# EAGLE board roller-shutter-rs485-double (EAGLE 9.6.2)
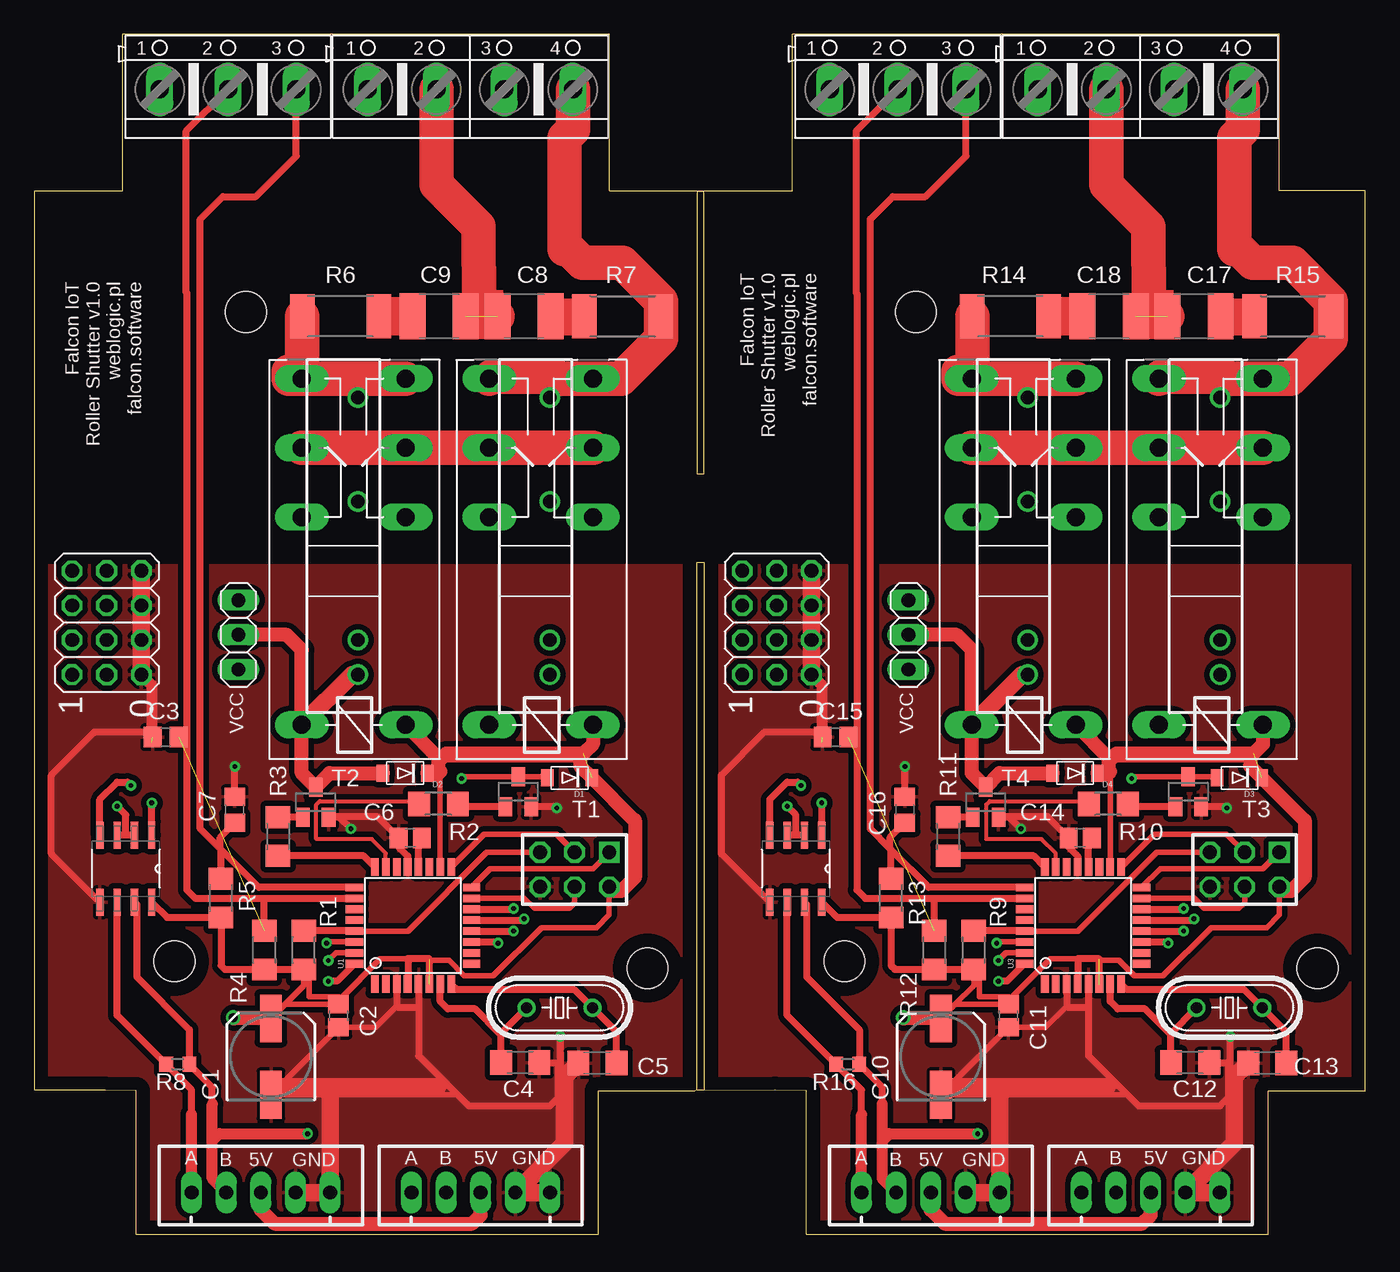
[diagram p0: board, top side]
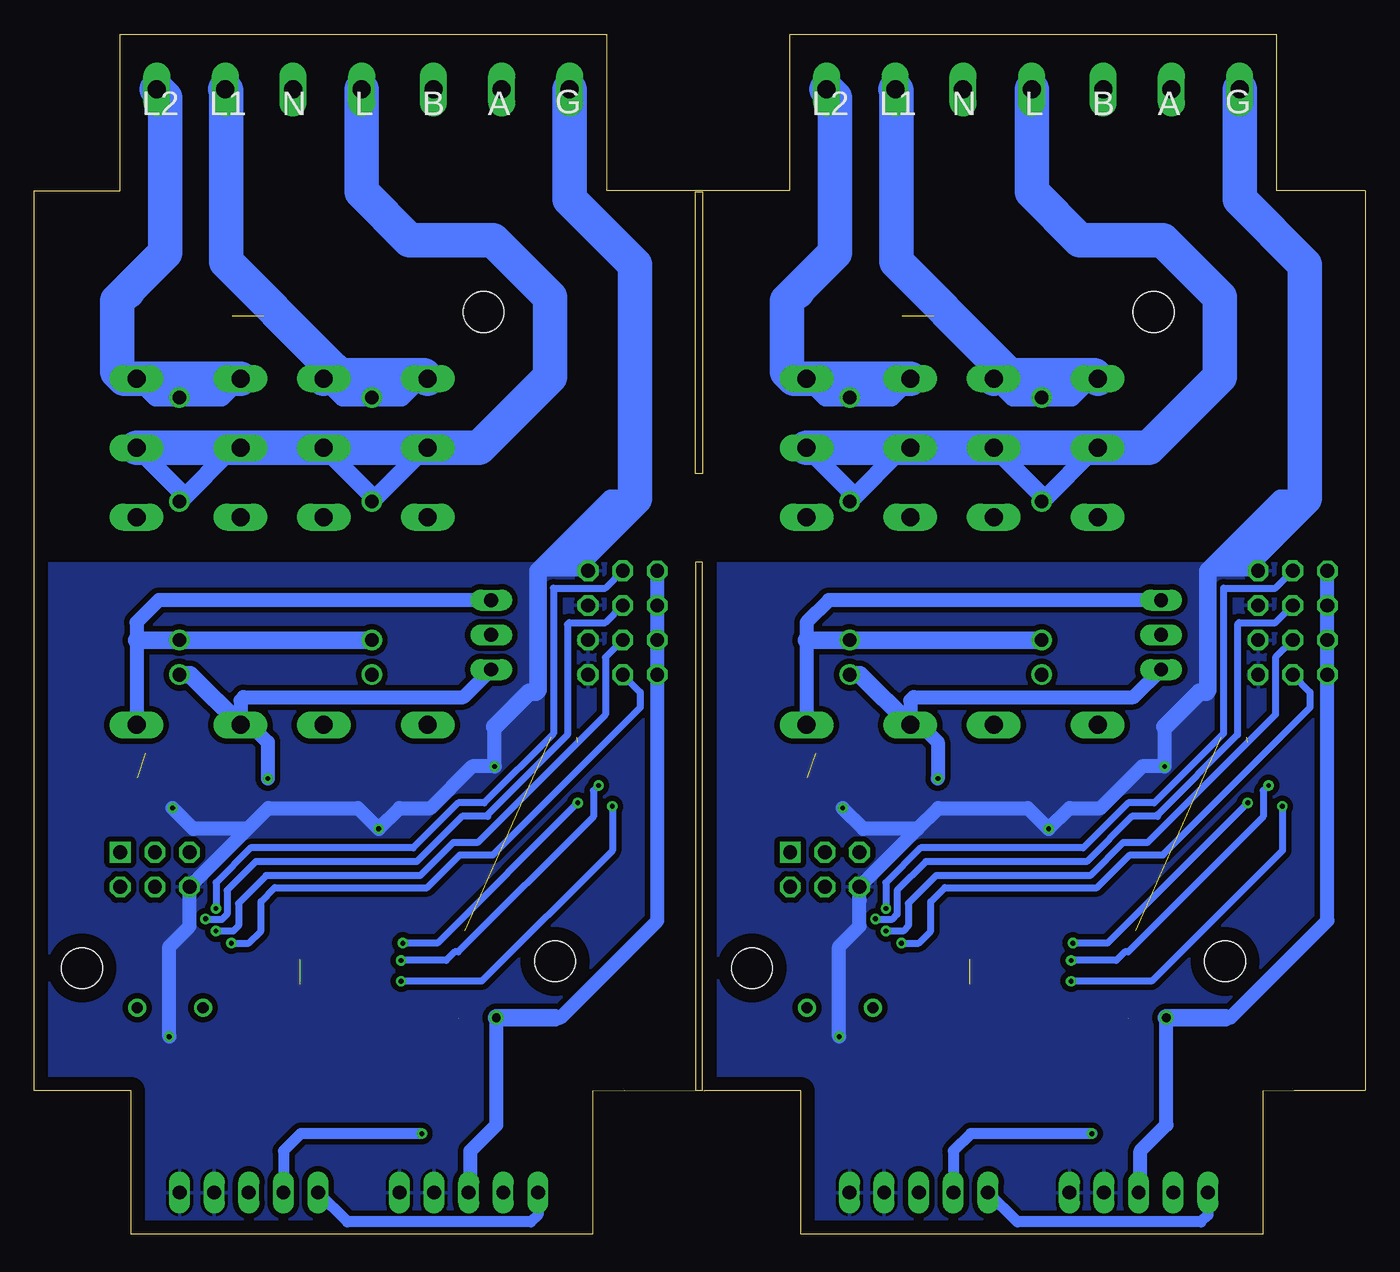
[diagram p1: board, bottom side, seen from below]

Size 97.65 x 88 mm. Coordinates in mm from the lower left corner, seen from the top.
Outline: 7.5,0 41.4,0 41.4,10.5 48.5,10.5 54.36,10.54 56.65,10.5 56.65,0 90.55,0 90.55,10.5 97.65,10.5 97.65,76.5 91.35,76.5 91.35,88 55.65,88 55.65,76.5 42.2,76.5 42.2,88 6.5,88 6.5,76.5 0,76.5 0,10.54 5.21,10.54 7.5,10.5 7.5,0
Outline: 48.64,55.75 49.15,55.75 49.15,76.45 48.64,76.45 48.64,55.75
Outline: 48.64,49.28 49.15,49.28 49.15,10.54 48.64,10.54 48.64,49.28
Copper layers (1*16): Top 0.035mm / dielectric 1.5mm / Bottom 0.035mm
Design rules "default": minimum track width 6mil, minimum drill 0.35mm, track to track 6mil, track to pad 6mil, pad to pad 6mil, via to via 6mil, smd to smd 6mil, copper to edge 40mil, drill to drill 6mil, minimum pad ring 10mil, minimum via ring 8mil, stop-mask expansion 4mil, vias tented up to drill 0mil, thermal gap 10mil
Holes 3 mm at 10.3,20 15.55,67.62 45,19.5 59.45,20 64.7,67.62 94.15,19.5

## Footprints (pad centres in the part's own frame; a part is rotated, then mirrored left to right if it is on the bottom)
SANYO-OSCON_SMD_C6 = smd 3.5 x 1.6: + 2.8,0; - -2.8,0
C0805 = smd 1.3 x 1.5: 1 -0.85,0; 2 0.85,0
C0805' = smd 1.3 x 1.5: 1 -0.95,0; 2 0.95,0
C1206 = smd 1.6 x 1.8: 1 -1.4,0; 2 1.4,0
C1812 = smd 1.9 x 3.4: 1 -1.95,0; 2 1.95,0
SOD-123FL = smd 0.91 x 1.22: A 1.637,0; C -1.637,0
AVR-ISP-6 = drill 1.016 square: 1 -2.54,-1.27 | drill 1.016 octagon: 2 -2.54,1.27; 3 0,-1.27; 4 0,1.27; 5 2.54,-1.27; 6 2.54,1.27
1X03 = drill 1.016 long: 1 -2.54,0; 2 0,0; 3 2.54,0
3X04 = drill 1 octagon: 1 -3.81,-3.81; 4 -1.27,-3.81; 7 1.27,-3.81; 10 3.81,-3.81 | drill 1.016 octagon: 2 -3.81,-1.27; 3 -3.81,1.27; 5 -1.27,-1.27; 6 -1.27,1.27; 8 1.27,-1.27; 9 1.27,1.27; 11 3.81,-1.27; 12 3.81,1.27
RP420 = drill 1.321 long: 11 16.51,-3.81; 12 11.43,-3.81; 14 21.59,-3.81; 21 16.51,3.81; 22 11.43,3.81; 24 21.59,3.81; A1 -3.81,-3.81; A2 -3.81,3.81
OMRON-G3MB-202P-SSR = drill 1: 1 -12.7,0; 2 -5.08,0; 3 5.08,0; 4 7.62,0
HC49/S = drill 0.813: 1 -2.413,0; 2 2.413,0
R1206 = smd 1.6 x 1.803: 1 -1.422,0; 2 1.422,0
R2512 = smd 1.8 x 3.2: 1 -2.8,0; 2 2.8,0
R0603 = smd 1 x 1.1: 1 -0.85,0; 2 0.85,0
SOT23 = smd 1 x 1.4: 1 -0.95,-1.1; 2 0.95,-1.1; 3 0,1.1
TQFP32-08 = smd 1.27 x 0.559: 1 -4.293,2.8; 2 -4.293,2; 3 -4.293,1.2; 4 -4.293,0.4; 5 -4.293,-0.4; 6 -4.293,-1.2; 7 -4.293,-2; 8 -4.293,-2.8; 17 4.293,-2.8; 18 4.293,-2; 19 4.293,-1.2; 20 4.293,-0.4; 21 4.293,0.4; 22 4.293,1.2; 23 4.293,2; 24 4.293,2.8 | smd 0.559 x 1.27: 9 -2.8,-4.293; 10 -2,-4.293; 11 -1.2,-4.293; 12 -0.4,-4.293; 13 0.4,-4.293; 14 1.2,-4.293; 15 2,-4.293; 16 2.8,-4.293; 25 2.8,4.293; 26 2,4.293; 27 1.2,4.293; 28 0.4,4.293; 29 -0.4,4.293; 30 -1.2,4.293; 31 -2,4.293; 32 -2.8,4.293
SOIC127P600X175-8N = smd 1.981 x 0.533: 1 -2.464,1.905; 2 -2.464,0.635; 3 -2.464,-0.635; 4 -2.464,-1.905; 5 2.464,-1.905; 6 2.464,-0.635; 7 2.464,0.635; 8 2.464,1.905
JST-XH-05-PACKAGE-LONG-PAD = drill 1.016 long: 1 -5.08,0; 2 -2.54,0; 3 0,0; 4 2.54,0; 5 5.08,0
AK500/3 = drill 1.321 long: 1 -5.004,0; 2 0,0; 3 5.004,0
AK500/4 = drill 1.321 long: 1 -7.518,0; 2 -2.489,0; 3 2.489,0; 4 7.518,0

## Placement (x,y rotation side)
C1  [SANYO-OSCON_SMD_C6]  17.38,13.02 90 top
C2  0.1uF  [C0805]  22.34,16.01 270 top
C3  [C0805']  9.65,36.45 0 top
C4  22pF  [C1206]  35.66,12.56 0 top
C5  22pF  [C1206]  41.33,12.54 180 top
C6  0.1uF  [C0805]  27.6,29.05 180 top
C7  [C0805']  14.73,31.11 270 top
C8  [C1812]  35.94,67.31 0 top
C9  [C1812]  29.72,67.31 180 top
C10  [SANYO-OSCON_SMD_C6]  66.53,13.02 90 top
C11  0.1uF  [C0805]  71.49,16.01 270 top
C12  22pF  [C1206]  84.81,12.56 0 top
C13  22pF  [C1206]  90.47,12.54 180 top
C14  0.1uF  [C0805]  76.75,29.05 180 top
C15  [C0805']  58.8,36.45 0 top
C16  [C0805']  63.88,31.11 270 top
C17  [C1812]  85.09,67.31 0 top
C18  [C1812]  78.87,67.31 180 top
D1  [SOD-123FL]  39.28,33.46 180 top
D2  [SOD-123FL]  27.22,33.79 180 top
D3  [SOD-123FL]  88.43,33.46 180 top
D4  [SOD-123FL]  76.37,33.79 180 top
JP1  AVR-ISP-6  [AVR-ISP-6]  39.66,26.73 180 top
JP2  [1X03]  14.99,43.94 90 top
JP3  AVR-ISP-6  [AVR-ISP-6]  88.81,26.73 180 top
JP4  [1X03]  64.14,43.94 90 top
JP5  [3X04]  55.75,44.83 270 top
JP6  [3X04]  6.6,44.83 270 top
K1  RP421110  [RP420]  37.19,41.15 90 top
K2  OMRON-G3MB-202P-SSR  [OMRON-G3MB-202P-SSR]  37.85,48.64 270 top
K3  OMRON-G3MB-202P-SSR  [OMRON-G3MB-202P-SSR]  23.75,48.64 270 top
K4  RP421110  [RP420]  23.45,41.15 90 top
K5  RP421110  [RP420]  86.34,41.15 90 top
K6  RP421110  [RP420]  72.6,41.15 90 top
K7  OMRON-G3MB-202P-SSR  [OMRON-G3MB-202P-SSR]  87,48.64 270 top
K8  OMRON-G3MB-202P-SSR  [OMRON-G3MB-202P-SSR]  72.9,48.64 270 top
Q1  16MHz  [HC49/S]  38.54,16.6 180 top
Q2  16MHz  [HC49/S]  87.69,16.6 180 top
R1  10K  [R1206]  19.79,20.82 270 top
R2  [R1206]  29.66,31.55 0 top
R3  [R1206]  17.9,29.15 90 top
R4  [R1206]  16.89,20.83 270 top
R5  [R1206]  13.72,24.64 270 top
R6  [R2512]  22.48,67.31 180 top
R7  [R2512]  43.18,67.31 0 top
R8  120R  [R0603]  10.54,12.45 180 top
R9  10K  [R1206]  68.94,20.82 270 top
R10  [R1206]  78.81,31.55 0 top
R11  [R1206]  67.05,29.15 90 top
R12  [R1206]  66.04,20.83 270 top
R13  [R1206]  62.87,24.64 270 top
R14  [R2512]  71.63,67.31 180 top
R15  [R2512]  92.33,67.31 0 top
R16  120R  [R0603]  59.69,12.45 180 top
T1  BC847  [SOT23]  35.52,32.45 0 top
T2  BC847  [SOT23]  20.66,31.68 0 top
T3  BC847  [SOT23]  84.67,32.45 0 top
T4  BC847  [SOT23]  69.81,31.68 0 top
U1  ATMEGA328  [TQFP32-08]  27.8,22.62 90 top
U2  MAX487ESA+TCBX  [SOIC127P600X175-8N]  6.73,26.8 270 top
U3  ATMEGA328  [TQFP32-08]  76.95,22.62 90 top
U4  MAX487ESA+TCBX  [SOIC127P600X175-8N]  55.88,26.8 270 top
X1  JST-XH-05-PIN-LONG-PAD  [JST-XH-05-PACKAGE-LONG-PAD]  65.79,3.05 0 top
X2  JST-XH-05-PIN-LONG-PAD  [JST-XH-05-PACKAGE-LONG-PAD]  16.64,3.05 0 top
X3  JST-XH-05-PIN-LONG-PAD  [JST-XH-05-PACKAGE-LONG-PAD]  32.77,3.05 0 top
X4  [AK500/3]  14.22,83.95 0 top
X5  [AK500/4]  32,83.95 0 top
X6  JST-XH-05-PIN-LONG-PAD  [JST-XH-05-PACKAGE-LONG-PAD]  81.92,3.05 0 top
X7  [AK500/3]  63.37,83.95 0 top
X8  [AK500/4]  81.15,83.95 0 top

## Library data of the parts
C1 C10 = rcl; SPICEPREFIX: C
C2 C4-C6 C11-C14 D1-D4 R1 R9 = adafruit
C3 C7-C9 C15-C18 = eagle-ltspice; SPICEMODEL: NONE; SPICEPREFIX: C
JP1 JP3 = atmel-1
JP2 JP4 = pinhead
JP5 JP6 = pinhead-zmiany-JP
K1 K4-K6 = relay; MF: TYCO ELECTRONICS; MPN: RP421110; OC_FARNELL: unknown; OC_NEWARK: 39C2625
K2 K3 K7 K8 = Omron G3MB 202p SSR
Q1 Q2 = crystal
R2-R8 R10-R16 = eagle-ltspice; SPICEMODEL: NONE; SPICEPREFIX: R
T1-T4 = transistor
U1 U3 = thecustomgeek
U2 U4 = MAX487ESA_TCBX; AVAILABILITY: Warning; DESCRIPTION: 1/1 Transceiver Half RS422, RS485 8-SOIC; MF: Maxim Integrated; MP: MAX487ESA+TCBX; PACKAGE: SOIC-8 Maxim Integrated; PRICE: None; PURCHASE-URL: https://pricing.snapeda.com/search/part/MAX487ESA+TCBX/?ref=eda
X1-X3 X6 = Rembrandt Electronics - JST XH Connectors v1-0
X4 X5 X7 X8 = con-ptr500; OC_FARNELL: unknown; OC_NEWARK: unknown

## Nets
A: R8.2 U2.6 X2.1 X3.1
A0: R2.1 U1.23
A1: R3.1 U1.24
A2: C7.2 R5.1 U1.25 X4.3
A3: C3.2 R4.1 U1.26 X4.2
A4: R10.1 U3.23
A5: R11.1 U3.24
A6: U1.19
A7: U1.22
A8: C16.2 R13.1 U3.25 X7.3
A9: C15.2 R12.1 U3.26 X7.2
A10: U3.19
A11: U3.22
A12: R16.2 U4.6 X1.1 X6.1
AREF: C6.1 U1.20
AREF1: C14.1 U3.20
B: R8.1 U2.7 X2.2 X3.2
B1: R16.1 U4.7 X1.2 X6.2
D0: U1.30 U2.1
D1: U1.31 U2.4
D2: U1.32 U2.2 U2.3
D3: U1.1
D4: U1.2
D5: U1.9
D6: U1.10
D7: JP6.11 U1.11
D8: JP6.8 U1.12
D9: JP6.5 U1.13
D10: JP6.2 U1.14
D11: JP1.4 U1.15
D12: JP1.1 U1.16
D13: JP1.3 U1.17
D14: U3.30 U4.1
D15: U3.31 U4.4
D16: U3.32 U4.2 U4.3
D17: U3.1
D18: U3.2
D19: U3.9
D20: U3.10
D21: JP5.11 U3.11
D22: JP5.8 U3.12
D23: JP5.5 U3.13
D24: JP5.2 U3.14
D25: JP3.4 U3.15
D26: JP3.1 U3.16
D27: JP3.3 U3.17
GND: C1.- C2.2 C3.1 C4.2 C5.2 C6.2 C7.1 JP1.6 JP6.3 JP6.6 JP6.9 JP6.12 T1.2 T2.2 U1.3 U1.5 U1.21 U2.5 X2.4 X2.5 X3.4 X3.5 X4.1
GND1: C10.- C11.2 C12.2 C13.2 C14.2 C15.1 C16.1 JP3.6 JP5.3 JP5.6 JP5.9 JP5.12 T3.2 T4.2 U3.3 U3.5 U3.21 U4.5 X1.4 X1.5 X6.4 X6.5 X7.1
N$1: D1.A JP2.1 K1.A2 K2.4 T1.3
N$2: D2.A JP2.2 K3.4 K4.A2 T2.3
N$3: C12.1 Q2.2 U3.7
N$4: K1.11 K1.21 K2.2 K3.2 K4.11 K4.21 X5.1
N$5: R2.2 T1.1
N$6: R3.2 T2.1
N$7: K1.14 K1.24 K2.1 R7.2 X5.4
N$8: K3.1 K4.14 K4.24 R6.2 X5.3
N$9: C8.2 R7.1
N$10: C9.2 R6.1
N$11: C8.1 C9.1 X5.2
N$12: C13.1 Q2.1 U3.8
N$13: D3.A JP4.1 K5.A2 K7.4 T3.3
N$14: D4.A JP4.2 K6.A2 K8.4 T4.3
N$15: R10.2 T3.1
N$16: R11.2 T4.1
N$17: K5.11 K5.21 K6.11 K6.21 K7.2 K8.2 X8.1
N$18: K5.14 K5.24 K7.1 R15.2 X8.4
N$19: K6.14 K6.24 K8.1 R14.2 X8.3
N$20: C17.2 R15.1
N$21: C18.2 R14.1
N$22: C17.1 C18.1 X8.2
N$43: C4.1 Q1.2 U1.7
N$44: C5.1 Q1.1 U1.8
RST: JP1.5 R1.1 U1.29
RST1: JP3.5 R9.1 U3.29
SCL: U1.28
SCL1: U3.28
SDA: U1.27
SDA1: U3.27
VCC: C1.+ C2.1 D1.C D2.C JP1.2 JP2.3 JP6.1 JP6.4 JP6.7 JP6.10 K1.A1 K2.3 K3.3 K4.A1 R1.2 R4.2 R5.2 U1.4 U1.6 U1.18 U2.8 X2.3 X3.3
VCC1: C10.+ C11.1 D3.C D4.C JP3.2 JP4.3 JP5.1 JP5.4 JP5.7 JP5.10 K5.A1 K6.A1 K7.3 K8.3 R9.2 R12.2 R13.2 U3.4 U3.6 U3.18 U4.8 X1.3 X6.3

## Tracks (layer width: path | path; a pad name or v marks a point on that pad's centre or on a via)
A
  Top 0.508: 11.56,8.76 11.56,10.58 R8.2 6.1,16.04 U2.6
  Top 0.813: X2.1 11.56,8.76
  Bottom 0.813: X2.1 11.56,1.4 12.06,0.89 25.53,0.89 X3.1
A0
  Top 0.305: U1.23 25.8,27.92 24.77,28.96 20.7,28.96 20.7,31.5 20.95,31.75 28.04,31.75 R2.1
A1
  Top 0.508: U1.24 24.18,27.73 R3.1
A2
  Top 0.508: U1.25 16.49,25.42 13.72,28.19 | 13.72,28.19 13.65,28.26 | 13.65,28.26 12.19,29.72 12.19,74.42 13.84,76.07 16.26,76.07 19.23,79.05 X4.3 | R5.1 13.72,28.19 | 13.65,28.26 13.65,29.09 C7.2
A3  (1 unrouted)
  Top 0.508: 17.02,24.62 11.83,24.62 11.2,25.25 11.2,69 11.18,69.02 11.18,80.9 X4.2 | 17.02,24.62 U1.26 | R4.1 16.89,24.49 17.02,24.62
A4
  Top 0.305: U3.23 74.95,27.92 73.91,28.96 69.85,28.96 69.85,31.5 70.1,31.75 77.19,31.75 R10.1
A5
  Top 0.508: U3.24 73.33,27.73 R11.1
A8
  Top 0.508: U3.25 65.64,25.42 62.87,28.19 | 62.87,28.19 62.8,28.26 | 62.8,28.26 61.34,29.72 61.34,74.42 62.99,76.07 65.41,76.07 68.38,79.05 X7.3 | R13.1 62.87,28.19 | 62.8,28.26 62.8,29.09 C16.2
A9  (1 unrouted)
  Top 0.508: 66.17,24.62 60.98,24.62 60.35,25.25 60.35,69 60.33,69.02 60.33,80.9 X7.2 | 66.17,24.62 U3.26 | R12.1 66.04,24.49 66.17,24.62
A12
  Top 0.508: 60.71,8.76 60.71,10.58 R16.2 55.24,16.04 U4.6
  Top 0.813: X1.1 60.71,8.76
  Bottom 0.813: X1.1 60.71,1.4 61.21,0.89 74.68,0.89 X6.1
AREF
  Top 0.508: U1.20 28.2,28.8 C6.1
AREF1
  Top 0.508: U3.20 77.35,28.8 C14.1
B  (via drill 0.35)
  Top 0.508: 13.08,9.53 13.08,10.76 R8.1 11.39,14.99 7.53,18.85 7.53,24.17 U2.7
  Top 0.813: X2.2 13.08,4.06 13.08,6.86 | 13.08,6.86 13.08,9.53 | 13.08,6.86 13.59,7.37 v20.07,7.37
  Bottom 0.813: v20.07,7.37 28.96,7.37 30.23,6.1 X3.2
B1  (via drill 0.35)
  Top 0.508: 62.23,9.53 62.23,10.76 R16.1 60.54,14.99 56.68,18.85 56.68,24.17 U4.7
  Top 0.813: X1.2 62.23,4.06 62.23,6.86 | 62.23,6.86 62.23,9.53 | 62.23,6.86 62.74,7.37 v69.22,7.37
  Bottom 0.813: v69.22,7.37 78.11,7.37 79.38,6.1 X6.2
D0  (via drill 0.35)
  Top 0.406: U1.30 21.55,21.42 v21.46,21.34
  Top 0.508: U2.1 v8.64,31.62
  Bottom 0.508: v8.64,31.62 18.92,21.34 v21.46,21.34
D1  (via drill 0.35)
  Top 0.406: U1.31 22.14,20.62 v21.59,20.07
  Top 0.508: U2.4 4.83,31.88 6.1,33.15 6.86,33.15 v7.11,32.89
  Bottom 0.508: v7.11,32.89 7.49,32.51 7.49,30.61 17.4,20.7 17.65,20.7 18.29,20.07 v21.59,20.07
D2  (via drill 0.35)
  Top 0.508: U2.2 6.73,29.26 | 6.73,29.26 U2.3 | U1.32 22.23,18.54 v21.59,18.54 | 6.73,29.26 6.73,30.73 v6.1,31.37
  Bottom 0.508: v6.1,31.37 6.1,28.12 15.68,18.54 v21.59,18.54
D7  (via drill 0.35)
  Top 0.508: U1.11 33.95,21.42 v34.04,21.34
  Bottom 0.508: v34.04,21.34 32.77,21.34 31.88,22.23 31.88,24.38 30.86,25.4 19.68,25.4 17.27,27.81 14.86,27.81 4.06,38.61 4.06,39.75 JP6.11
D8  (via drill 0.35)
  Top 0.508: U1.12 v35.17,22.22 v35.18,22.23
  Bottom 0.508: v35.18,22.23 33.91,22.23 33.53,22.61 33.53,24.26 31.5,26.29 20.19,26.29 17.78,28.7 16,28.7 6.6,38.1 6.6,42.29 JP6.8
D9  (via drill 0.35)
  Top 0.508: U1.13 35.85,23.02 v35.94,23.11
  Bottom 0.508: v35.94,23.11 35.89,23.06 34.75,23.06 34.37,23.44 34.37,25.2 32.26,27.3 20.45,27.3 17.12,30.63 15.24,30.63 15.24,30.76 9.4,36.6 9.4,44.7 9.27,44.83 6.6,44.83 JP6.5
D10  (via drill 0.35)
  Top 0.508: U1.14 35.13,23.82 v35.18,23.88
  Bottom 0.508: v35.18,23.88 35.18,25.78 32.64,28.32 20.7,28.32 17.4,31.62 15.49,31.62 10.41,36.7 10.41,47.37 6.6,47.37 JP6.2
D11
  Top 0.406: U1.15 35.96,24.62 36.7,23.88 39.24,23.88 39.66,24.29 JP1.4
D12
  Top 0.406: JP1.1 40.99,26.8 33.47,26.8 U1.16
D13
  Top 0.406: JP1.3 38.32,29.34 33.02,29.34 U1.17
D14  (via drill 0.35)
  Top 0.406: U3.30 70.7,21.42 v70.61,21.34
  Top 0.508: U4.1 v57.78,31.62
  Bottom 0.508: v57.78,31.62 68.07,21.34 v70.61,21.34
D15  (via drill 0.35)
  Top 0.406: U3.31 71.29,20.62 v70.74,20.07
  Top 0.508: U4.4 53.98,31.88 55.24,33.15 56.01,33.15 v56.26,32.89
  Bottom 0.508: v56.26,32.89 56.64,32.51 56.64,30.61 66.55,20.7 66.8,20.7 67.44,20.07 v70.74,20.07
D16  (via drill 0.35)
  Top 0.508: U4.2 55.88,29.26 | 55.88,29.26 U4.3 | U3.32 71.38,18.54 v70.74,18.54 | 55.88,29.26 55.88,30.73 v55.24,31.37
  Bottom 0.508: v55.24,31.37 55.24,28.12 64.82,18.54 v70.74,18.54
D21  (via drill 0.35)
  Top 0.508: U3.11 83.1,21.42 v83.19,21.34
  Bottom 0.508: v83.19,21.34 81.92,21.34 81.03,22.23 81.03,24.38 80.01,25.4 68.83,25.4 66.42,27.81 64.01,27.81 53.21,38.61 53.21,39.75 JP5.11
D22  (via drill 0.35)
  Top 0.508: U3.12 v84.32,22.22 v84.33,22.23
  Bottom 0.508: v84.33,22.23 83.06,22.23 82.68,22.61 82.68,24.26 80.64,26.29 69.34,26.29 66.93,28.7 65.15,28.7 55.75,38.1 55.75,42.29 JP5.8
D23  (via drill 0.35)
  Top 0.508: U3.13 85,23.02 v85.09,23.11
  Bottom 0.508: v85.09,23.11 85.04,23.06 83.9,23.06 83.52,23.44 83.52,25.2 81.41,27.3 69.6,27.3 66.27,30.63 64.39,30.63 64.39,30.76 58.55,36.6 58.55,44.7 58.42,44.83 55.75,44.83 JP5.5
D24  (via drill 0.35)
  Top 0.508: U3.14 84.28,23.82 v84.33,23.88
  Bottom 0.508: v84.33,23.88 84.33,25.78 81.79,28.32 69.85,28.32 66.55,31.62 64.64,31.62 59.56,36.7 59.56,47.37 55.75,47.37 JP5.2
D25
  Top 0.406: U3.15 85.11,24.62 85.85,23.88 88.39,23.88 88.81,24.29 JP3.4
D26
  Top 0.406: JP3.1 90.14,26.8 82.62,26.8 U3.16
D27
  Top 0.406: JP3.3 87.47,29.34 82.17,29.34 U3.17
GND  (via drill 0.35)  (1 unrouted)
  Top 0.254: C6.2 26.31,29.49 | C6.2 26.12,29.68 | C6.2 26.75,28.38 | 26.6,16.71 | 26.6,16.71 26.6,17.65 | U1.3
  Top 0.406: C2.2 C1.- 31.05,10.22 | C2.2 25.05,15.16 26.6,16.71
  Top 0.508: v38.35,31.24 38.25,31.35 T1.2 | U1.21 27.41,26.93 27.41,27.72 26.75,28.38 C6.2 26.31,29.49 26.12,29.68 25.19,30.61 21.64,30.61 T2.2 22.38,30.58 v23.24,29.72 | C4.2 38.48,12.56 38.48,11.29 | 38.48,11.29 38.61,11.29 | 38.61,11.29 38.68,11.29 C5.2 | U1.5 28.2,16.64 | 28.2,16.64 28.2,13.07 31.05,10.22 31.88,9.4 37.85,9.4 38.48,10.03 38.48,11.29 | 38.61,11.29 v38.61,14.48 | U1.3 26.6,17.65 26.6,16.71 26.67,16.64 28.2,16.64 | C7.1 v14.73,34.29 | U2.5 1.27,27.89 1.27,33.66 4.45,36.83 8.32,36.83 C3.1
  Top 0.813: JP6.12 8.64,40.26 8.64,36.08
  Top 1.27: C1.- 17.95,10.79 21.84,10.79 | 21.84,10.79 29.59,10.79 | X2.4 X2.5 21.72,10.67 21.84,10.79 | X3.5 X3.4 38.91,6.65 38.91,11.52 C5.2 | JP6.12 JP6.9 JP6.6 JP6.3
  Bottom 0.254: JP1.6 37.12,24.51
  Bottom 1.016: 32.86,29.72 JP1.6 37.12,24.51 37.12,22.57 38.61,21.08 v38.61,14.48 | 32.86,29.72 31.33,31.24 24.77,31.24 v23.24,29.72 21.72,31.24 19.43,31.24 16.38,34.29 v14.73,34.29 14.73,37.21 | 32.86,29.72 36.83,29.72 v38.35,31.24 | 7.87,48.87 JP6.3 7.87,48.51
  Bottom 1.27: 14.73,37.21 12.19,39.75 11.68,39.75 11.56,39.88 11.56,48.64 11.33,48.87 | 11.33,48.87 7.87,48.87 | 11.33,48.87 6.25,53.95 4.45,53.95
  Bottom 2.54: X4.1 9.22,75.87 4.45,71.09 4.45,53.95 8.48,49.91 8.76,49.91
  pour Top (isolate 0.406): 0.13,49.02 48.51,49.02 48.51,10.54 41.53,10.54 41.53,0.13 41.4,0 7.37,0 7.24,0.13 7.24,10.03 7.49,10.29 0.38,10.29 0.13,10.54
  pour Bottom (isolate 0.406): 0.13,49.15 48.51,49.15 48.51,10.41 41.78,10.41 41.66,10.54 41.66,0 41.53,-0.13 7.62,-0.13 7.37,0.13 7.37,10.54 -0.13,10.54 -0.13,49.15
GND1  (via drill 0.35)  (1 unrouted)
  Top 0.254: C14.2 75.46,29.49 | C14.2 75.27,29.68 | C14.2 75.9,28.38 | 75.75,16.71 | 75.75,16.71 75.75,17.65 | U3.3
  Top 0.406: 71.48,15.17 C10.- 80.19,10.22 80.2,10.22 | C11.2 74.2,15.16 75.75,16.71
  Top 0.508: v87.5,31.24 87.4,31.35 T3.2 | U3.21 76.56,26.93 76.56,27.72 75.9,28.38 C14.2 75.46,29.49 75.27,29.68 74.34,30.61 70.79,30.61 T4.2 71.53,30.58 v72.39,29.72 | C12.2 87.63,12.56 87.63,11.29 | 87.63,11.29 87.76,11.29 | 87.76,11.29 87.83,11.29 C13.2 | U3.5 77.35,16.64 | 77.35,16.64 77.35,13.07 80.2,10.22 81.03,9.4 87,9.4 87.63,10.03 87.63,11.29 | 87.76,11.29 v87.76,14.48 | U3.3 75.75,17.65 75.75,16.71 75.82,16.64 77.35,16.64 | C16.1 v63.88,34.29 | U4.5 50.42,27.89 50.42,33.66 53.59,36.83 57.47,36.83 C15.1
  Top 0.813: JP5.12 57.78,40.26 57.78,36.08
  Top 1.27: C10.- 67.1,10.79 70.99,10.79 | 70.99,10.79 78.74,10.79 | X1.4 X1.5 70.87,10.67 70.99,10.79 | X6.5 X6.4 88.06,6.65 88.06,11.52 C13.2 | JP5.12 JP5.9 JP5.6 JP5.3
  Bottom 0.254: JP3.6 86.27,24.51
  Bottom 1.016: 82,29.72 JP3.6 86.27,24.51 86.27,22.57 87.76,21.08 v87.76,14.48 | 82,29.72 80.48,31.24 73.91,31.24 v72.39,29.72 70.87,31.24 68.58,31.24 65.53,34.29 v63.88,34.29 63.88,37.21 | 82,29.72 85.98,29.72 v87.5,31.24 | 57.02,48.87 JP5.3 57.02,48.51
  Bottom 1.27: 63.88,37.21 61.34,39.75 60.83,39.75 60.71,39.88 60.71,48.64 60.48,48.87 | 60.48,48.87 57.02,48.87 | 60.48,48.87 55.4,53.95 53.59,53.95
  Bottom 2.54: X7.1 58.37,75.87 53.59,71.09 53.59,53.95 57.63,49.91 57.91,49.91
  pour Top (isolate 0.406): 49.28,49.02 97.66,49.02 97.66,10.54 90.68,10.54 90.68,0.13 90.55,0 56.52,0 56.39,0.13 56.39,10.03 56.64,10.29 49.53,10.29 49.28,10.54
  pour Bottom (isolate 0.406): 49.28,49.15 97.66,49.15 97.66,10.41 90.93,10.41 90.81,10.54 90.81,0 90.68,-0.13 56.77,-0.13 56.52,0.13 56.52,10.54 49.02,10.54 49.02,49.15
N$1  (via drill 0.35)
  Top 0.406: v31.37,33.4 31.52,33.55 T1.3 37.56,33.55 D1.A
  Bottom 1.016: v31.37,33.4 31.37,36.07 32.64,37.34 K1.A2 33.38,39.14 33.15,39.37 17.02,39.37 JP2.1
  Bottom 1.27: K1.A2 37.07,41.02 K2.4
N$2
  Top 1.016: D2.A 21.68,33.79 T2.3 19.64,33.8 K4.A2 19.64,42.84 18.54,43.94 JP2.2
  Top 1.27: K4.A2 23.33,41.02 K3.4
N$3
  Top 0.508: C12.1 83.41,14.61 83.35,14.67 | 83.35,14.67 Q2.2 | 83.35,14.67 81.5,16.51 79.5,16.51 78.95,17.06 U3.7
N$4
  Top 2.54: K1.11 K4.21
  Bottom 1.27: K3.2 19.82,57.66 K4.21 | 23.75,54.14 K4.11 | K1.21 33.91,57.66 K2.2 37.85,54.5 K1.11
  Bottom 2.54: K1.11 K1.21 K4.11 K4.21 | K4.21 17.78,57.66 | K4.21 15.88,57.66 10.67,62.87 10.67,68.71 14.86,72.9 20.95,72.9 24.49,76.43 X5.1
N$5
  Top 0.508: T1.1 31.28,31.35 R2.2
N$6
  Top 0.508: T2.1 R3.2
N$7
  Top 2.54: K1.24 33.51,62.87 38.35,62.87 38.48,62.73 K1.14 43.05,62.73 45.98,65.67 R7.2 45.98,68.41 43.18,71.21 40.25,71.21 39.26,72.21 38.91,72.21 38.91,80.39 39.52,81 X5.4
  Bottom 1.27: K1.24 34.77,61.34 K2.1 39.61,61.34 K1.14
  Bottom 2.54: 41.66,69.09 41.66,69.22 | 41.66,69.22 42.42,68.45 42.42,63.25 41.91,62.73 K1.14 K1.24 | 41.66,69.22 38.91,71.96 38.91,83.34 X5.4
N$8
  Top 2.54: K4.14 K4.24 18.67,62.73 18.67,63.25 19.68,63.25 R6.2
  Bottom 1.27: 19.9,62.99 21.55,61.34 K3.1 25.87,61.34 K4.14
  Bottom 2.54: 27.26,64.13 34.42,71.29 34.42,83.87 X5.3 | K4.14 27.26,64.13 | K4.24 19.9,62.99 26.12,62.99 27.26,64.13
N$9
  Top 1.016: R7.1 40.25,67.18 38.02,67.18 C8.2
N$10
  Top 1.016: C9.2 27.64,67.18 25.41,67.18 R6.1
N$11  (1 unrouted)
  Top 2.54: X5.2 29.52,76.96 32.59,73.88 32.64,68.03 C8.1
N$12
  Top 0.508: C13.1 91.87,14.83 Q2.1 | Q2.1 89.93,16.42 | U3.8 80.13,17.95 88.76,17.95 Q2.1
N$13  (via drill 0.35)
  Top 0.406: v80.52,33.4 80.67,33.55 T3.3 86.71,33.55 D3.A
  Bottom 1.016: v80.52,33.4 80.52,36.07 81.78,37.34 K5.A2 82.53,39.14 82.3,39.37 66.17,39.37 JP4.1
  Bottom 1.27: K5.A2 86.22,41.02 K7.4
N$14
  Top 1.016: D4.A 70.82,33.79 T4.3 68.79,33.8 K6.A2 68.79,42.84 67.69,43.94 JP4.2
  Top 1.27: K6.A2 72.48,41.02 K8.4
N$15
  Top 0.508: T3.1 80.43,31.35 R10.2
N$16
  Top 0.508: T4.1 R11.2
N$17
  Top 2.54: K5.11 K6.21
  Bottom 1.27: K8.2 68.96,57.66 K6.21 | 72.9,54.14 K6.11 | K5.21 83.06,57.66 K7.2 87,54.5 K5.11
  Bottom 2.54: K5.11 K5.21 K6.11 K6.21 | K6.21 66.93,57.66 | K6.21 65.03,57.66 59.82,62.87 59.82,68.71 64.01,72.9 70.1,72.9 73.64,76.43 X8.1
N$18
  Top 2.54: K5.24 82.66,62.87 87.5,62.87 87.63,62.73 K5.14 92.2,62.73 95.13,65.67 R15.2 95.13,68.41 92.33,71.21 89.4,71.21 88.41,72.21 88.06,72.21 88.06,80.39 88.67,81 X8.4
  Bottom 1.27: K5.24 83.92,61.34 K7.1 88.76,61.34 K5.14
  Bottom 2.54: 90.81,69.09 90.81,69.22 | 90.81,69.22 91.57,68.45 91.57,63.25 91.06,62.73 K5.14 K5.24 | 90.81,69.22 88.06,71.96 88.06,83.34 X8.4
N$19
  Top 2.54: K6.14 K6.24 67.82,62.73 67.82,63.25 68.83,63.25 R14.2
  Bottom 1.27: 69.05,62.99 70.7,61.34 K8.1 75.02,61.34 K6.14
  Bottom 2.54: 76.41,64.13 83.57,71.29 83.57,83.87 X8.3 | K6.14 76.41,64.13 | K6.24 69.05,62.99 75.27,62.99 76.41,64.13
N$20
  Top 1.016: R15.1 89.4,67.18 87.17,67.18 C17.2
N$21
  Top 1.016: C18.2 76.79,67.18 74.56,67.18 R14.1
N$22  (1 unrouted)
  Top 2.54: X8.2 78.66,76.96 81.74,73.88 81.79,68.03 C17.1
N$43
  Top 0.508: C4.1 34.26,14.61 34.2,14.67 | 34.2,14.67 Q1.2 | 34.2,14.67 32.36,16.51 30.35,16.51 29.8,17.06 U1.7
N$44
  Top 0.508: C5.1 42.73,14.83 Q1.1 | Q1.1 40.78,16.42 | U1.8 30.98,17.95 39.61,17.95 Q1.1
RST
  Top 0.406: 37.06,27.94 JP1.5 33.2,28 27.43,22.22 U1.29
  Top 0.508: U1.29 23.48,22.25 R1.1
RST1
  Top 0.406: 86.21,27.94 JP3.5 82.35,28 76.58,22.22 U3.29
  Top 0.508: U3.29 72.63,22.25 R9.1
VCC  (via drill 0.65)  (3 unrouted)
  Top 0.254: C1.+ 18.24,16.68
  Top 0.406: U1.18 29.8,33.4 | 29.8,33.4 29.8,33.91 29.8,34.8 39.88,34.8 | 40.07,34.99 39.88,34.8 | 39.88,34.8 40.92,33.75 D1.C | D2.C 29.25,33.4 29.8,33.4 | 27.43,20.19 25.4,20.19 22.48,17.27 22.35,17.4 | 22.35,17.4 20.19,17.4 20.19,19 R1.2 19.79,18.23 18.42,16.86 | 22.35,17.36 22.35,17.4 | C1.+ 18.24,16.68 18.42,16.86 | C2.1 18.42,16.86 | 29,20.15 29.08,20.07 30.43,20.07 31.56,18.94 33.67,18.94 37.21,22.48 41.27,22.48 42.2,23.4 JP1.2
  Top 0.508: U1.6 29,20.15 28.96,20.19 27.43,20.19 27.43,18.36 U1.4 | R1.2 R4.2 13.99,19.41 13.72,19.68 R5.2 9.75,23.22 U2.8
  Top 1.016: X2.3 16.64,1.78 17.65,0.76 32.13,0.76 32.77,1.4 X3.3 32.77,2.54 | C1.+ 14.66,15.82 v14.61,15.88 | K1.A1 41,35.92 40.32,35.24 | JP1.2 42.51,25.15 43.05,25.15 44.07,26.16 44.07,30.35 44.03,30.35 D1.C 40.07,34.31 40.07,34.99 40.32,35.24 30.25,35.24 29.8,34.8 | D2.C 29.69,33.79 | 29.8,33.91 29.69,33.79 | 29.69,33.79 29.69,34.68 29.8,34.8 | 29.8,34.8 K4.A1
  Bottom 1.016: X2.3 16.51,3.17 16.51,6.1 14.61,8 v14.61,15.88 | JP2.3 39.37,46.48 41,44.85 41,43.56 K1.A1 | 10.29,15.88 9.91,15.88 2.79,22.99 JP6.10 JP6.7 JP6.4 JP6.1
  Bottom 1.27: v14.61,15.88 10.29,15.88 | K3.3 K2.3 41,43.56
VCC1  (via drill 0.65)  (3 unrouted)
  Top 0.254: C10.+ 67.39,16.68
  Top 0.406: U3.18 78.95,33.4 | 78.95,33.4 78.95,33.91 78.95,34.8 89.02,34.8 | 89.22,34.99 89.02,34.8 | 89.02,34.8 90.07,33.75 D3.C | D4.C 78.4,33.4 78.95,33.4 | 76.58,20.19 74.55,20.19 71.63,17.27 71.5,17.4 | 71.5,17.4 69.34,17.4 69.34,19 R9.2 68.94,18.23 67.57,16.86 | 71.5,17.36 71.5,17.4 | C10.+ 67.39,16.68 67.57,16.86 | C11.1 67.57,16.86 | 78.15,20.15 78.23,20.07 79.58,20.07 80.71,18.94 82.82,18.94 86.36,22.48 90.42,22.48 91.34,23.4 JP3.2
  Top 0.508: U3.6 78.15,20.15 78.11,20.19 76.58,20.19 76.58,18.36 U3.4 | R9.2 R12.2 63.14,19.41 62.87,19.68 R13.2 58.9,23.22 U4.8
  Top 1.016: X1.3 65.79,1.78 66.8,0.76 81.28,0.76 81.92,1.4 X6.3 81.92,2.54 | C10.+ 63.81,15.82 v63.75,15.88 | K5.A1 90.15,35.92 89.47,35.24 | JP3.2 91.66,25.15 92.2,25.15 93.22,26.16 93.22,30.35 93.18,30.35 D3.C 89.22,34.31 89.22,34.99 89.47,35.24 79.4,35.24 78.95,34.8 | D4.C 78.83,33.79 | 78.95,33.91 78.83,33.79 | 78.83,33.79 78.83,34.68 78.95,34.8 | 78.95,34.8 K6.A1
  Bottom 1.016: X1.3 65.66,3.17 65.66,6.1 63.75,8 v63.75,15.88 | JP4.3 88.52,46.48 90.15,44.85 90.15,43.56 K5.A1 | 59.44,15.88 59.05,15.88 51.94,22.99 JP5.10 JP5.7 JP5.4 JP5.1
  Bottom 1.27: v63.75,15.88 59.44,15.88 | K8.3 K7.3 90.15,43.56
(copper drawn outside any net)
  shapes: Top area x8

## Text on the board
tPlace: VCC | VCC
tNames: Falcon IoT / Roller Shutter v1.0 / weblogic.pl / falcon.software | Falcon IoT / Roller Shutter v1.0 / weblogic.pl / falcon.software | 1 | 0 | 1 | 0 | A | B | 5V | GND | A | B | 5V | GND | A | B | 5V | GND | A | B | 5V | GND
bNames: G | A | B | L | N | L1 | L2 | G | A | B | L | N | L1 | L2
bValues: Falcon IoT / Roller Shutter v1.0 / weblogic.pl / falcon.software